# Altium PCB imu_digital.PcbDoc
Units mil, origin at the board's own origin, x right, y up, seen from the top; angles counter-clockwise.
Board outline 2000 x 2000 mil, 2 copper layers (Top Layer, Bottom Layer); 88 components, 69 nets, 329 pads, 9 vias.
Unrouted connection lines stored in the file: 203.
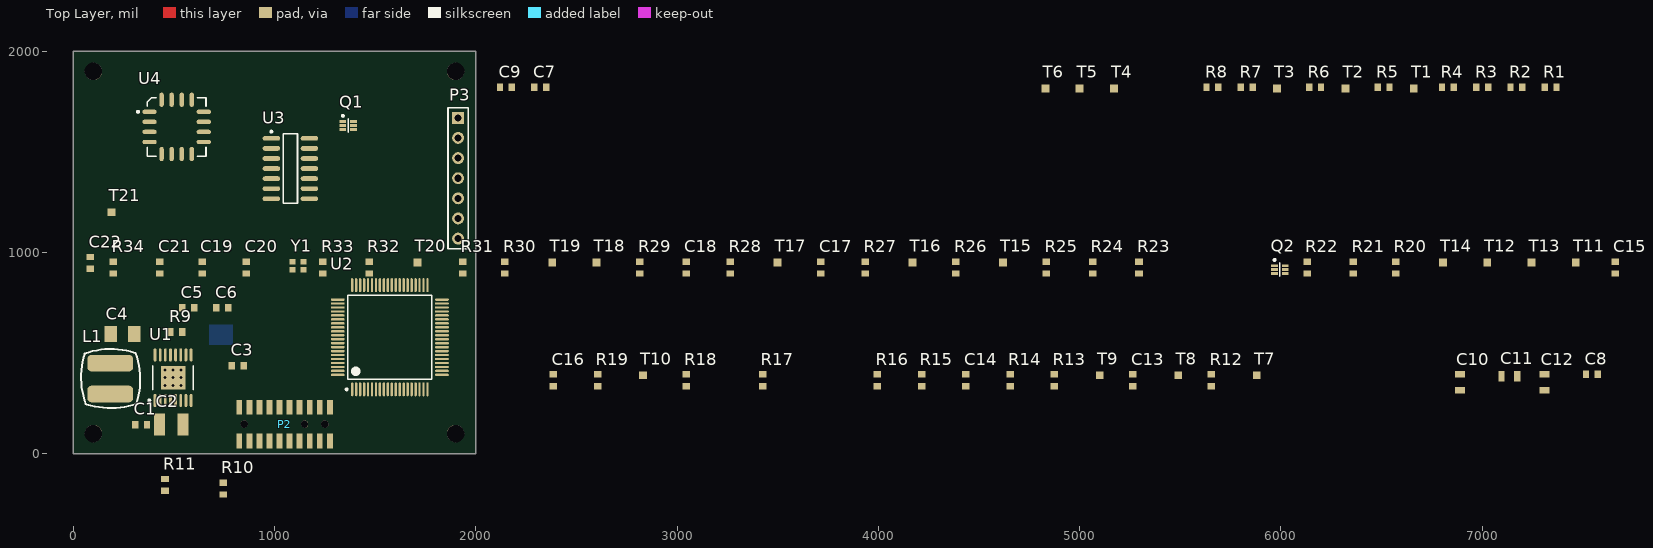
[diagram p0: Top Layer view]
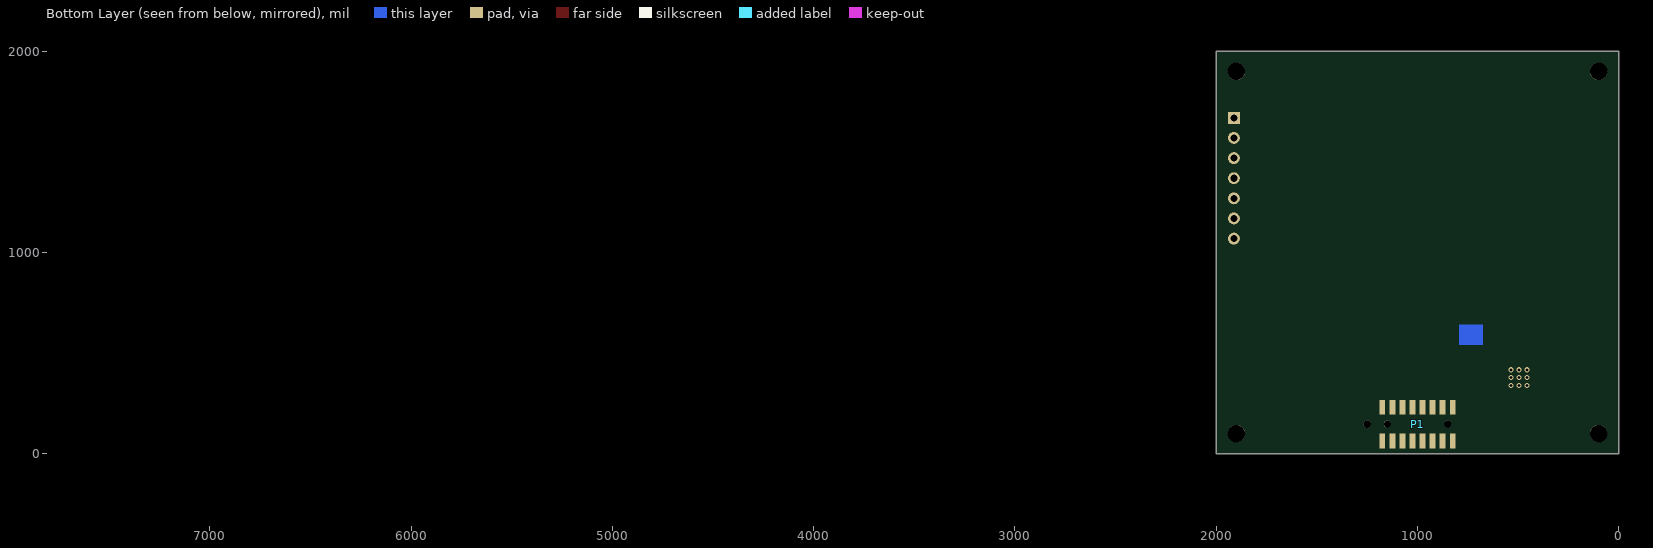
[diagram p1: Bottom Layer view, seen from below]

## Layer stack, top to bottom
Top Layer: signal copper 1.4
Dielectric: dielectric 12.6, FR-4, Dk 4.8
Bottom Layer: signal copper 1.4

## Board outline
0,0 2000,0 2000,2000 0,2000

## Design rules (kind name [scope] priority, off if disabled: settings)
Clearance [All] p1: gap=6
ComponentClearance [All] p1: gap=5 collisioncheckmode=3 verticalgap=1 showdistances=FALSE
DiffPairsRouting [All] p1: maxlimit=10 minlimit=6 mostfreqgap=6 maxuncoupledlength=500
HoleSize [All] p1: absolutevalues=TRUE maxlimit=100 minlimit=15 maxpercent=80.000 minpercent=20.000
HoleToHoleClearance [All] p1: gap=6 allowstackedmicrovias=TRUE
PolygonConnect [All] p1: connectstyle=Relief reliefconductorwidth=10 reliefentries=4 polygonreliefangle="90 Angle"
RoomDefinition imu_digital [InComponentClass('imu_digital')] p1: confinementstyle=ConfineIn formatcopy=TRUE lockcomponents=FALSE outline -6,-12 8080,-12 8080,1990 -6,1990
RoutingVias [All] p1: holewidth=15 width=25 viastyle="Through Hole" minholewidth=15 minwidth=25 maxholewidth=100 maxwidth=200
SilkToSilkClearance [All] p1: silktosilkclearance=0
SilkscreenOverComponentPads [All] p1: minsilkscreentomaskgap=0
SolderMaskExpansion [All] p1: expansion=-300
Width [All] p1: maxlimit=100 minlimit=6 preferedwidth=6
22 further rules are at their usual default settings.

## Components (designator, comment, footprint, x,y, rotation, side; value= is the part's Value field where it differs from the comment)
C1 "Cb" "0603 (1608)" 337,145 r0 top
C2 "Cin" "1210 (3225)" 487,146 r0 top
C3 "Cinx" "0603 (1608)" 817,438 r0 top
C4 "Cout" "1206 (3216)" 245,595 r0 top
C5 "Css" "0603 (1608)" 571,725 r0 top
C6 "Cbyp" "0603 (1608)" 741,725 r0 top
C7 "Capacitor" "0603 (1608)" 2320,1820 r0 top
C8 "Capacitor" "0603 (1608)" 7545,395 r0 top
C9 "Capacitor" "0603 (1608)" 2150,1820 r0 top
C10 "1.5uF" "0805 (2012)" 6890,355 r90 top
C11 "1.5uF" "0805 (2012)" 7135,385 r0 top
C12 "1.5uF" "0805 (2012)" 7310,355 r90 top
C13 "1nF" "0603 (1608)" 5265,365 r90 top
C14 "1uF" "0603 (1608)" 4435,365 r90 top
C15 "Capacitor" "0603 (1608)" 7660,925 r90 top
C16 "1nF" "0603 (1608)" 2385,365 r90 top
C17 "1nF" "0603 (1608)" 3715,925 r90 top
C18 "Capacitor" "0603 (1608)" 3045,925 r90 top
C19 "Capacitor" "0603 (1608)" 640,925 r90 top
C20 "6pF" "0603 (1608)" 860,925 r90 top
C21 "6pF" "0603 (1608)" 430,925 r90 top
C22 "Capacitor" "0603 (1608)" 85,948 r90 top
L1 "L1" "Inductor Footprint" 184,297 r0 top
P1 "2x8smd0.5female" S9007E-08-ND 1000,147 r0 bottom locked
P2 "MHDR2X10" S9013E-10-ND 1050,147 r0 top locked
P3 "Header 7" HDR1X7 1912,1669 r270 top
Q1 "MOSFET N CH" SOT563F 1366,1631 r0 top
Q2 "MOSFET P CH" SOT563F 5995,915 r0 top
R1 "Res1" "0603 (1608)" 7340,1820 r0 top
R2 "Res1" "0603 (1608)" 7170,1820 r0 top
R3 "Res1" "0603 (1608)" 7000,1820 r0 top
R4 "Res1" "0603 (1608)" 6830,1820 r0 top
R5 "Res1" "0603 (1608)" 6510,1820 r0 top
R6 "Res1" "0603 (1608)" 6170,1820 r0 top
R7 "Res1" "0603 (1608)" 5830,1820 r0 top
R8 "Res1" "0603 (1608)" 5660,1820 r0 top
R9 "Ron" "0603 (1608)" 513,605 r180 top
R10 "Rfb2" "0603 (1608)" 745,-173 r90 top
R11 "Rfb1" "0603 (1608)" 456,-155 r270 top
R12 "931 1%" "0603 (1608)" 5655,365 r90 top
R13 "200" "0603 (1608)" 4875,365 r90 top
R14 "499K 1%" "0603 (1608)" 4655,365 r90 top
R15 "1K" "0603 (1608)" 4215,365 r90 top
R16 "1K" "0603 (1608)" 3995,365 r90 top
R17 "Res1" "0603 (1608)" 3425,365 r90 top
R18 "Res1" "0603 (1608)" 3045,365 r90 top
R19 "499K 1%" "0603 (1608)" 2605,365 r90 top
R20 "1K" "0603 (1608)" 6570,925 r90 top
R21 "499K 1%" "0603 (1608)" 6360,925 r90 top
R22 "1K" "0603 (1608)" 6130,925 r90 top
R23 "931 1%" "0603 (1608)" 5295,925 r90 top
R24 "1K" "0603 (1608)" 5065,925 r90 top
R25 "Res1" "0603 (1608)" 4835,925 r90 top
R26 "Res1" "0603 (1608)" 4385,925 r90 top
R27 "499K 1%" "0603 (1608)" 3935,925 r90 top
R28 "931 1%" "0603 (1608)" 3265,925 r90 top
R29 "499K 1%" "0603 (1608)" 2815,925 r90 top
R30 "Res1" "0603 (1608)" 2145,925 r90 top
R31 "Res1" "0603 (1608)" 1935,925 r90 top
R32 "499K 1%" "0603 (1608)" 1470,925 r90 top
R33 "Res1" "0603 (1608)" 1240,925 r90 top
R34 "Res1" "0603 (1608)" 200,925 r90 top
T1 "TEST_PAD" TEST_PAD 6660,1815 r0 top
T2 "TEST_PAD" TEST_PAD 6320,1815 r0 top
T3 "TEST_PAD" TEST_PAD 5980,1815 r0 top
T4 "TEST_PAD" TEST_PAD 5170,1815 r0 top
T5 "TEST_PAD" TEST_PAD 5000,1815 r0 top
T6 "TEST_PAD" TEST_PAD 4830,1815 r0 top
T7 "" TEST_PAD 5880,390 r0 top
T8 "" TEST_PAD 5490,390 r0 top
T9 "" TEST_PAD 5100,390 r0 top
T10 "" TEST_PAD 2830,390 r90 top
T11 "" TEST_PAD 7465,950 r90 top
T12 "" TEST_PAD 7025,950 r90 top
T13 "" TEST_PAD 7245,950 r90 top
T14 "" TEST_PAD 6805,950 r90 top
T15 "" TEST_PAD 4620,950 r90 top
T16 "" TEST_PAD 4170,950 r90 top
T17 "" TEST_PAD 3500,950 r90 top
T18 "" TEST_PAD 2600,950 r90 top
T19 "" TEST_PAD 2380,950 r90 top
T20 "" TEST_PAD 1710,950 r90 top
T21 "" TEST_PAD 191,1200 r90 top
U1 "LM3103MH" MXA16A_N 496,378 r90 top
U2 "TMS320F28035" TS-PQFP-G80 1573,579 r90 top
U3 "LMV324M" M14A_N 1079,1417 r0 top
U4 "HMC1053" LCC-16 514,1624 r0 top
Y1 "XTAL" "Murata XTAL" 1090,915 r0 top

## Footprints (in the part's own frame and the unit in brackets; to place one, negate y for a bottom-side part, rotate by r counter-clockwise, add the part's x,y. Pads: shape width x height; smd on the part's side, far side on the other; paste and mask are expansions set on the pad)
"0603 (1608)" [mm] "Chip 2-Leads 0603 (1608)"
  rect 0.8x0.95 smd mask+0: 1(-0.75,0) 2(0.75,0)
  body extent -0.77,-0.43 0.77,0.43, height 0.55
"0805 (2012)" [mm] "Chip 2-Leads, IPC Medium Density (2012)"
  rect 0.8x1.3 smd mask+0: 1(-1,0) 2(1,0)
  body extent -1.05,-0.63 1.05,0.63, height 0.5
"1206 (3216)" [mm] "Chip 2-Leads 1206 Body 3.2x2.1mm (3216)"
  rect 1.6x2 smd mask+0.051: 1(-1.5,0) 2(1.5,0)
  body extent -1.6,-0.85 1.6,0.85, height 1.72
"1210 (3225)" [mm] "Chip  2-Leads 1210 Body 3.2x2.5mm Rectangular Silk Screen (3225)"
  rect 1.4x2.8 smd mask+0: 1(-1.5,0) 2(1.5,0)
  body extent -1.6,-1.24 1.6,1.26, height 2.5
HDR1X7 [mm] "Connector; Header; 7 Position"
  rect 1.5x1.5 hole 0.9: 1(0,0)
  round 1.5 hole 0.9: 2(2.54,0) 3(5.08,0) 4(7.62,0) 5(10.16,0) 6(12.7,0) 7(15.24,0)
  silkscreen extent -1.27,-1.27 16.51,1.27
"Inductor Footprint" [mm] "SDR0604-101KLCT-ND"
  rrect50% 5.8x2.1 smd: 1(0,0) 2(0,3.9)
  silkscreen extent -3.67,-1.77 3.77,5.67
LCC-16 [mm] "HCM1053"
  oval 1.8x0.55 smd: 1(-3.425,1.905) 2(-3.425,0.635) 3(-3.425,-0.635) 4(-3.425,-1.905) 9(3.425,-1.905) 10(3.425,-0.635) 11(3.425,0.635) 12(3.425,1.905)
  oval 0.55x1.8 smd: 5(-1.905,-3.425) 6(-0.635,-3.425) 7(0.635,-3.425) 8(1.905,-3.425) 13(1.905,3.425) 14(0.635,3.425) 15(-0.635,3.425) 16(-1.905,3.425)
  silkscreen extent -5,-3.7 3.7,3.7, body extent -3.68,-3.69 3.69,3.68, height 2.8
M14A_N [mm] "SOIC, 14-Leads, Body 8.6x3.9mm, Pitch 1.27mm, IPC Medium Density"
  oval 2.2x0.6 smd: 1(-2.4,3.81) 2(-2.4,2.54) 3(-2.4,1.27) 4(-2.4,0) 5(-2.4,-1.27) 6(-2.4,-2.54) 7(-2.4,-3.81) 8(2.4,-3.81) 9(2.4,-2.54) 10(2.4,-1.27) 11(2.4,0) 12(2.4,1.27) 13(2.4,2.54) 14(2.4,3.81)
  silkscreen extent -2.52,-4.4 0.9,4.78, body extent -2,-4.38 2,4.38, height 1.75
"Murata XTAL" [mm] "490-5588-1-ND"
  rect 0.75x0.7 smd: 1(0,0) 2(0,1) 2(1.35,0) 3(1.35,1)
  body extent -0.33,-0.35 1.67,1.35, height 0.7
MXA16A_N [mm] "TSOP, 16-Leads, Body 5x4.4mm, Pitch 0.65mm, Exposed Pad, IPC Medium Density"
  oval 1.65x0.35 smd: 1(-2.875,2.275) 2(-2.875,1.625) 3(-2.875,0.975) 4(-2.875,0.325) 5(-2.875,-0.325) 6(-2.875,-0.975) 7(-2.875,-1.625) 8(-2.875,-2.275) 9(2.875,-2.275) 10(2.875,-1.625) 11(2.875,-0.975) 12(2.875,-0.325) 13(2.875,0.325) 14(2.875,0.975) 15(2.875,1.625) 16(2.875,2.275)
  rect 3x3.1 smd: 17(0,0)
  silkscreen extent -3,-2.55 1.5,3.12, body extent -2.25,-2.55 2.25,2.55, height 1.1
S9007E-08-ND [mm] "16 0.05\" smd header - female"
  round 0.9 hole 0.9: 0(-3.81,0) 0(3.81,0)
  rect 0.74x1.85 smd: 1(-4.445,2.125) 2(-4.445,-2.125) 3(-3.175,2.125) 4(-3.175,-2.125) 5(-1.905,2.125) 6(-1.905,-2.125) 7(-0.635,2.125) 8(-0.635,-2.125) 9(0.635,2.125) 10(0.635,-2.125) 11(1.905,2.125) 12(1.905,-2.125) 13(3.175,2.125) 14(3.175,-2.125) 15(4.445,2.125) 16(4.445,-2.125)
S9013E-10-ND [mm] "20-POS Header SMD"
  round 0.9 hole 0.9: 0(-5.08,0) 0(5.08,0)
  rect 0.74x1.85 smd: 1(-5.715,2.125) 2(-5.715,-2.125) 3(-4.445,2.125) 4(-4.445,-2.125) 5(-3.175,2.125) 6(-3.175,-2.125) 7(-1.905,2.125) 8(-1.905,-2.125) 9(-0.635,2.125) 10(-0.635,-2.125) 11(0.635,2.125) 12(0.635,-2.125) 13(1.905,2.125) 14(1.905,-2.125) 15(3.175,2.125) 16(3.175,-2.125) 17(4.445,2.125) 18(4.445,-2.125) 19(5.715,2.125) 20(5.715,-2.125)
SOT563F [mm] "SOT23, 6-Leads, Body 1.7x1.7mm (max), Pitch 0.50mm, IPC Medium Density"
  rect 0.85x0.35 smd: 1(-0.675,0.5) 2(-0.675,0) 3(-0.675,-0.5) 4(0.675,-0.5) 5(0.675,0) 6(0.675,0.5)
  silkscreen extent -0.8,-0.85 0,1.35, body extent -0.6,-0.85 0.6,0.85, height 0.6
TEST_PAD [mm]
  rect 1x1 smd: 0(0,0)
TS-PQFP-G80 [mm] "TMS320F28035 (80-pin)"
  oval 1.75x0.3 smd: 1(-6.575,4.75) 2(-6.575,4.25) 3(-6.575,3.75) 4(-6.575,3.25) 5(-6.575,2.75) 6(-6.575,2.25) 7(-6.575,1.75) 8(-6.575,1.25) 9(-6.575,0.75) 10(-6.575,0.25) 11(-6.575,-0.25) 12(-6.575,-0.75) 13(-6.575,-1.25) 14(-6.575,-1.75) 15(-6.575,-2.25) 16(-6.575,-2.75) 17(-6.575,-3.25) 18(-6.575,-3.75) 19(-6.575,-4.25) 20(-6.575,-4.75) 41(6.575,-4.75) 42(6.575,-4.25) 43(6.575,-3.75) 44(6.575,-3.25) 45(6.575,-2.75) 46(6.575,-2.25) 47(6.575,-1.75) 48(6.575,-1.25) 49(6.575,-0.75) 50(6.575,-0.25) 51(6.575,0.25) 52(6.575,0.75) 53(6.575,1.25) 54(6.575,1.75) 55(6.575,2.25) 56(6.575,2.75) 57(6.575,3.25) 58(6.575,3.75) 59(6.575,4.25) 60(6.575,4.75)
  oval 0.3x1.75 smd: 21(-4.75,-6.575) 22(-4.25,-6.575) 23(-3.75,-6.575) 24(-3.25,-6.575) 25(-2.75,-6.575) 26(-2.25,-6.575) 27(-1.75,-6.575) 28(-1.25,-6.575) 29(-0.75,-6.575) 30(-0.25,-6.575) 31(0.25,-6.575) 32(0.75,-6.575) 33(1.25,-6.575) 34(1.75,-6.575) 35(2.25,-6.575) 36(2.75,-6.575) 37(3.25,-6.575) 38(3.75,-6.575) 39(4.25,-6.575) 40(4.75,-6.575) 61(4.75,6.575) 62(4.25,6.575) 63(3.75,6.575) 64(3.25,6.575) 65(2.75,6.575) 66(2.25,6.575) 67(1.75,6.575) 68(1.25,6.575) 69(0.75,6.575) 70(0.25,6.575) 71(-0.25,6.575) 72(-0.75,6.575) 73(-1.25,6.575) 74(-1.75,6.575) 75(-2.25,6.575) 76(-2.75,6.575) 77(-3.25,6.575) 78(-3.75,6.575) 79(-4.25,6.575) 80(-4.75,6.575)
  silkscreen extent -6.7,-5.3 5.3,5.57, body extent -6,-6 6,6, height 1.6

## Part data
C1 C3 C5 C10 C11 C12 C13 C14 C16 C17 C20 C21: library part Capacitor
C2 C4 C6: library part Capacitor, "COG Ceramic Cap -> near input to ads1178"
L1: library part Inductor, "Inductor"
P2: "Header, 10-Pin, Dual row, Male"
P3: "Header, 7-Pin"
Q1 Q2: library part MOSFETs
R1 R2 R3 R4 R5 R6 R7 R8 R17 R18 R25 R26 R30 R31 R33 R34: "Resistor"
R9 R10 R11 R12 R13 R14 R15 R16 R19 R20 R21 R22 R23 R24 R27 R28 R29 R32: library part Res1, "Resistor"
T7 T8 T9 T10 T11 T12 T13 T14 T15 T16 T17 T18 T19 T20 T21: library part TEST_PAD
U1: "Synchronous 1MHz 0.75A Step-Down Voltage  Regulator"
U2: library part "TMS320F28035 (80-pin)", "80-pin"
U3: "General Purpose, Low Voltage, Rail-to-Rail Output Operational Amplifiers"

## Free pads (board coordinates)
  round 86 hole 86: 0(100,100) 1(1900,100) 2(1900,1900) 3(100,1900)

## Via types
v1: diameter 25, hole 15, Top Layer to Bottom Layer, tented top, 9 vias

## Nets (pads, with @x,y where several pads share a name; then routed paths per layer and width w, separated by ;. In a path a pad name is that pad's centre, name@x,y a point inside that pad or via, vN(x,y) a via of type N, cw(c..) or ccw(c..) an arc to the next point about the centre after c; other vN are vias at no path point)
3.3V: C4.1 C7.2 C8.2 C9.2 C18.1 C19.1 L1.2 P3.7 R10.2 R13.1 R33.2 T5.0 U2.20 U2.36 U2.70 U3.4 U4.1
5V: T2.0
ADC_DRDY: P2.18 U2.78
ADC_SYNC: P2.20 U2.79
AGND: C9.1 C18.2 C19.2 C22.2 R15.1 R16.1 R20.1 R22.1 R24.1 R34.1 U2.11 U2.13 U2.15 U2.21 U2.22 U2.23 U2.24 U2.26 U2.28 U2.30 U3.11 U4.5 U4.11 U4.14
CLK_A: P2.19 R12.2 T7.0
DGND: C7.1 C8.1 C10.1 C11.1 C12.1 C14.1 C20.1 C21.1 P3.1 Q2.1 U2.8 U2.35 U2.53 U2.71 U2.73 U4.8
EN_SIG: P1.7 P2.8
MAG_S/R: Q1.2 Q2.2 R28.1 T11.0
MISO: P1.3 P2.4 R23.2
MISO_A: P2.17 T8.0 U2.42
MOSI: P1.1 P2.2 U2.80
NetC1_1: C1.1 L1.1 U1.3 U1.4
NetC1_2: C1.2 U1.5
NetC5_1: C5.1 U1.7
NetC6_1: C6.1 U1.14
NetC10_2: C10.2 U2.7
NetC11_2: C11.2 U2.54
NetC12_2: C12.2 U2.72
NetC13_1: C13.1 R14.1 R17.2 U3.2
NetC13_2: C13.2 R14.2 T10.0 U2.16 U3.1
NetC14_2: C14.2 Q1.6 R13.2 T9.0
NetC15_1: C15.1 U4.3 U4.6
NetC15_2: C15.2 Q1.1 Q2.6 T12.0
NetC16_1: C16.1 R21.1 R25.2 U3.6
NetC16_2: C16.2 R21.2 T16.0 U2.17 U3.7
NetC17_1: C17.1 R29.1 R30.2 U3.9
NetC17_2: C17.2 R29.2 T20.0 U2.18 U3.8
NetC20_2: C20.2 U2.52 Y1.3
NetC21_2: C21.2 U2.51 Y1.1
NetC22_1: C22.1 R33.1 R34.2 U3.12
NetP1_2: P1.2 P2.1 R1.1
NetP1_4: P1.4 P2.3 R2.1
NetP1_6: P1.6 P2.5 R3.1
NetP1_8: P1.8 P2.7 R4.1
NetP1_10: P1.10 P2.9 R5.1
NetP1_12: P1.12 P2.11 R6.1
NetP1_14: P1.14 P2.13 R7.1
NetP1_16: P1.16 P2.15 R8.1
NetP3_2: P3.2 U2.60
NetP3_3: P3.3 U2.59
NetP3_4: P3.4 U2.58
NetP3_5: P3.5 U2.57
NetP3_6: P3.6 U2.10
NetR9_2: R9.2 U1.13
NetR10_1: R10.1 R11.2 U1.11
NetR12_1: R12.1 U2.41
NetR15_2: R15.2 U2.12
NetR16_2: R16.2 U2.14
NetR17_1: R17.1 T14.0 U4.16
NetR18_1: R18.1 T13.0 U4.10
NetR18_2: R18.2 R19.2 U3.3
NetR20_2: R20.2 U2.29
NetR22_2: R22.2 U2.27
NetR23_1: R23.1 U2.76
NetR24_2: R24.2 U2.25
NetR25_1: R25.1 T15.0 U4.12
NetR26_1: R26.1 T17.0 U4.4
NetR26_2: R26.2 R27.2 U3.5
NetR28_2: R28.2 U2.68
NetR30_1: R30.1 T18.0 U4.13
NetR31_1: R31.1 T19.0 U4.9
NetR31_2: R31.2 R32.2 U3.10
PWR_EN: P2.10 U2.74
SCK: P1.5 P2.6 U2.77
SS: R1.2 R2.2 R3.2 R4.2 R5.2 R6.2 R7.2 R8.2 U2.75
VBAT: C2.1 C3.1 P1.13 P2.14 R9.1 T1.0 T4.0 U1.1 U1.2
VGND: C2.2 C3.2 C4.2 C5.2 C6.2 P1.15 P2.16 R11.1 T3.0 T6.0 U1.6 U1.9 U1.10 U1.15 U1.16 U1.17
  other v1: 456.63,338.63 496,338.63 535.37,338.63 456.63,378 496,378 535.37,378 456.63,417.37 496,417.37 535.37,417.37
VREF/2: R19.1 R27.1 R32.1 T21.0 U3.13 U3.14
pads on no net: P1.0 P1.9 P1.11 P2.0 P2.12 Q1.3 Q1.4 Q1.5 Q2.3 Q2.4 Q2.5 U1.8 U1.12 U2.1 U2.2 U2.3 U2.4 U2.5 U2.6 U2.9 U2.19 U2.31 U2.32 U2.33 U2.34 U2.37 U2.38 U2.39 U2.40 U2.43 U2.44 U2.45 U2.46 U2.47 U2.48 U2.49 U2.50 U2.55 U2.56 U2.61 U2.62 U2.63 U2.64 U2.65 U2.66 U2.67 U2.69 U4.2 U4.7 U4.15 Y1.2

## Other copper
Bottom Layer:
  rectangle net VGND: 675,541 793,643